# Altium PCB SC1.0.pcbdoc (part 2 of 2)
Units mm, origin at the board's own origin, x right, y up, seen from the top; angles counter-clockwise.
Board outline 78.88 x 53.72 mm, 2 copper layers (Top Layer, Bottom Layer); 127 components, 102 nets, 381 pads, 137 vias.
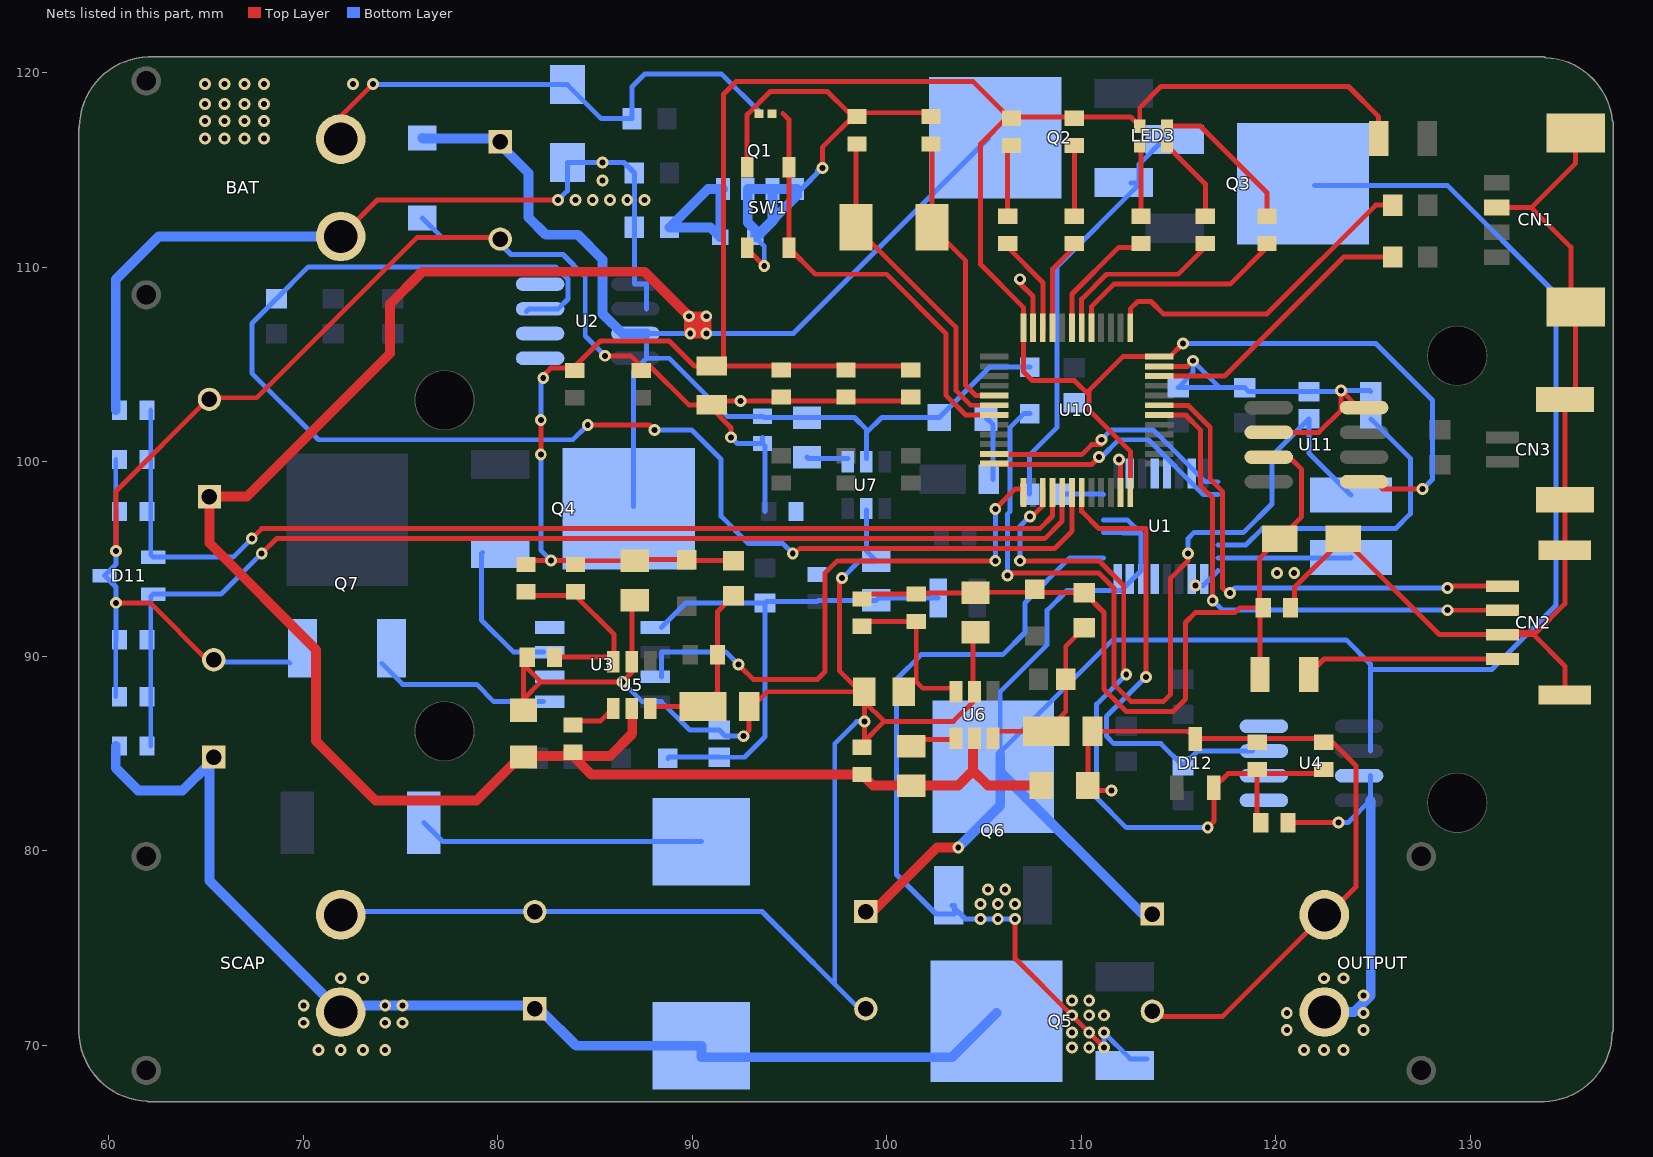
[diagram p2: the nets of this part, all layers, seen from the top]

## Via types
v1: diameter 0.61, hole 0.305, Top Layer to Bottom Layer, 137 vias

## Nets (pads, with @x,y where several pads share a name; then routed paths per layer and width w, separated by ;. In a path a pad name is that pad's centre, name@x,y a point inside that pad or via, vN(x,y) a via of type N, cw(c..) or ccw(c..) an arc to the next point about the centre after c; other vN are vias at no path point) (continued)
GND: C1.2 C4.1 C5.2 C7.2 C8.2 C11.2 C12.2 C13.2 C14.2 C15.2 C17.2 C18.2 C19.2 C26.2 C27.2 C28.1 C29.2 C30.1 C31.1 C32.2 C33.2 C34.1 C35.1 C36.1 C37.2 C38.1 C39.1 C44.1 C45.1 C46.1 CN1.0 CN1.2 CN2.2 CN2.5 CN2.6 CN3.3 CN3.4 D1A.2 D3.2 D4.1 D9.2 D10.2 D11.3 D12.3 L7.1 OUTPUT.- Q1.1 Q1.2 Q1.3 Q7.3 R2A.1 R3.1 R8.1 R9.1 R15.1 R25.1 R26.1 R27.1 SCAP.- SW1.1 SW1.2 U1.8 U3.4 U5.2 U6.2 U7.2 U10.23 U10.35 U10.47 U11.2 U11.8 | length 356.4
  Top Layer w0.254: v1(60.379,92.758) 62.136,92.758 C12.2@65.184,89.71 ; v1(60.379,95.425) 60.379,98.494 65.184,103.299 67.618,103.299 75.865,111.547 C8.2@79.81,111.547 ; C27.2@81.334,87.227 81.324,89.964 81.323,89.594 82.223,88.694 ; C27.2@81.334,87.227 81.334,87.805 82.223,88.694 ; v1(85.525,105.458) 86.839,105.458 L7.1@87.393,104.904 ; C17.2@87.049,92.885 86.921,92.758 86.921,90.015 86.921,89.202 v1(86.414,88.694) 82.223,88.694 ; L7.1@87.392,104.905 87.856,104.905 89.827,102.934 C39.1@91.011,102.934 ; C39.1@90.822,102.934 92.002,101.754 v1(92.002,101.267) ; C39.1@91.011,102.934 91.211,103.135 v1(92.498,103.134) 94.58,103.135 97.907,103.134 C38.1@101.237,103.134 ; v1(92.637,85.9) 92.935,86.199 D1A.2@92.935,87.424 ; SW1.2@92.831,115.153 92.831,117.856 92.88,117.904 94.023,119.047 96.955,119.047 98.048,117.954 C35.1@98.479,117.954 ; SW1.1@92.891,110.919 v1(93.711,110.074) ; D1A.2@92.935,87.252 93.87,88.186 R8.1@98.86,88.186 ; v1(96.701,115.11) 96.701,116.176 C35.1@98.479,117.954 ; v1(97.717,94.028) 97.59,93.901 97.59,89.246 R8.1@98.65,88.186 ; 100.257,86.662 99.876,86.662 ; C34.1@102.289,117.954 C35.1@98.479,117.954 ; C18.2@104.575,91.234 104.447,91.107 104.447,88.364 104.448,87.678 103.432,86.662 99.876,86.662 ; v1@106.861,109.268 106.861,109.177 107.532,108.506 U10.47@107.532,106.714 ; v1(111.56,83.106) 110.601,83.106 C26.2@110.347,83.36 110.347,85.913 D9.2@110.588,86.154 115.476,86.154 D12.3@115.878,85.753 115.909,85.784 119.053,85.784 R27.1@122.482,85.784 ; v1(111.941,100.124) 112.032,100.033 U10.23@112.032,98.614 ; C15.2@113.338,71.493 117.281,71.493 OUTPUT.-@122.505,76.716 122.695,76.716 124.133,78.153 124.133,84.376 122.726,85.783 R27.1@122.482,85.783 ; U10.35@113.832,104.914 115.461,104.914 v1(115.751,105.204) ; U11.2@119.078,101.521 122.228,101.521 123.371,102.664 v1(123.371,103.68) 124.26,102.791 U11.8@125.123,102.791 ; C33.2@120.969,92.504 120.969,93.544 C32.2@123.485,96.06 128.428,91.117 CN2.2@131.676,91.117 ; CN1.2@131.379,113.083 133.15,113.078 ; CN2.6@134.876,88.017 134.876,89.508 133.267,91.117 CN2.2@131.676,91.117 ; CN2.5@134.876,95.467 134.876,92.706 133.404,91.234 131.793,91.234 CN2.2@131.676,91.117 ; CN2.5@134.876,95.467 CN3.4@134.877,98.057 CN3.3@134.877,103.207 135.429,103.759 CN1.0@135.429,107.964 ; CN1.0@135.428,107.963 135.182,107.963 135.182,111.046 133.15,113.078 ; CN1.0@135.429,116.922 135.429,115.357 133.15,113.078 ; R8.1@98.86,88.186 98.86,87.678 99.876,86.662 ; R8.1@98.86,88.186 v1(98.86,86.647) 98.86,85.458 C28.1@98.733,85.33 98.733,85.519 99.876,86.662
  Bottom Layer w0.254: D11.3@59.793,94.155 60.379,94.741 v1(60.379,95.425) 60.379,97.447 60.368,97.457 60.368,100.124 ; D11.3@59.793,94.155 60.379,93.571 v1(60.379,92.758) 60.379,90.853 60.369,90.853 60.368,87.932 ; C12.2@65.184,89.71 69.259,89.71 Q7.3@69.319,89.649 ; SCAP.-@71.936,76.716 72.103,76.883 82.223,76.883 93.596,76.883 98.987,71.493 97.336,73.144 97.336,85.519 98.463,86.647 v1(98.86,86.647) ; D4.1@76.127,112.545 77.124,111.547 C8.2@79.81,111.547 ; C8.2@79.81,111.547 80.691,110.665 83.366,110.665 84.509,109.522 84.509,106.474 v1(85.525,105.458) ; v1(86.414,88.694) 87.43,87.678 88.42,87.678 89.88,86.219 C11.2@91.396,86.219 91.715,85.9 v1(92.637,85.9) ; v1(92.002,101.267) 92.321,100.948 93.623,100.948 93.739,100.832 93.739,97.457 ; Q1.3@92.861,114.032 Q1.2@94.131,114.032 ; 93.622,100.947 93.622,101.267 ; v1(93.711,110.074) 93.711,111.097 D3.2@93.253,111.554 95.4,113.703 95.4,114.036 Q1.2@94.13,114.031 ; Q1.1@95.401,114.037 95.627,114.037 v1(96.701,115.11) 96.574,114.983 v1@96.447,114.983 ; v1(97.717,94.028) 98.606,94.917 C19.2@99.465,94.917 98.957,95.426 U7.2@98.957,97.534 ; C29.2@105.11,102.283 105.479,101.915 D10.2@105.479,99.108 ; R3.1@114.989,103.818 C4.1@118.418,103.818 ; R3.1@114.989,103.818 115.751,104.581 v1(115.751,105.204) 117.137,103.818 C4.1@118.418,103.818 118.618,103.618 C1.2@121.72,103.618 123.308,103.618 v1(123.371,103.68) 124.832,103.68 C5.2@124.895,103.618 ; v1(115.878,93.647) 116.284,93.647 117.046,94.409
  Bottom Layer w0.508: Q1.2@94.13,114.031 Q1.1@95.4,114.036 ; Q1.1@95.401,114.037 95.401,113.702 D3.2@93.253,111.554 ; D3.2@93.253,111.554 93.253,111.924 92.861,112.316 Q1.3@92.861,114.032 Q1.2@94.131,114.032 94.131,112.371 93.314,111.554 D3.2@93.253,111.554
  other v1: 120.069,94.282 120.958,94.282 106.861,109.395
HI3: Q4.1 U3.7 | length 7.4
  Bottom Layer w0.254: Q4.1@79.236,95.349 79.175,95.288 79.175,91.869 80.826,90.218 82.375,90.218
I_CHASSIS: C16.2 U4.7 U10.19 | length 24.8
  Top Layer w0.254: U10.19@110.031,98.613 110.031,97.462 110.925,96.568 113.338,96.568 v1(113.338,88.948)
  Bottom Layer w0.254: v1(113.338,88.948) 111.306,86.916 111.306,85.9 111.687,85.519 114.1,85.519 C16.2@115.243,84.387 ; C16.2@115.243,84.387 115.994,85.138 118.824,85.138
I_IN: C6.2 U2.7 U10.18 | length 74.7
  Top Layer w0.254: v1(84.636,101.902) 87.811,101.902 v1(88.065,101.648) ; v1(95.177,95.298) 95.558,95.552 108.639,95.552 109.532,96.445 U10.18@109.532,98.614
  Bottom Layer w0.254: 81.486,107.744 81.613,107.871 83.112,107.871 83.62,108.379 83.62,109.395 82.985,110.03 70.275,110.03 C6.2@68.634,108.39 67.364,107.119 67.364,104.569 70.793,101.14 83.874,101.14 v1(84.636,101.902) ; v1(88.065,101.648) 89.97,101.648 91.494,100.124 91.494,97.203 92.891,95.806 94.669,95.806 v1(95.177,95.298)
IN_HI1: U1.1 U10.11 | length 13.1
  Top Layer w0.254: U10.11@105.733,100.414 105.768,100.378 110.036,100.378 110.544,100.886 111.052,100.886 v1(111.052,101.14)
  Bottom Layer w0.254: v1(111.052,101.14) 111.56,101.648 113.719,101.648 116.386,98.981 117.046,98.981
IN_HI2: U1.2 U10.12 | length 13
  Top Layer w0.254: U10.12@105.732,99.914 105.776,99.87 110.544,99.87 v1(110.925,100.251)
  Bottom Layer w0.254: v1(110.925,100.251) 111.052,100.251 111.941,101.14 113.465,101.14 116.284,98.321 117.046,98.321
IN_HI3: U3.2 U3.3 U10.13 | length 29.1
  Top Layer w0.254: v1(92.383,89.583) 92.51,89.456 93.145,88.821 96.447,88.821 96.828,89.202 96.828,94.282 97.463,94.917 v1(105.591,94.917) ; v1(105.591,97.584) 106.621,98.614 U10.13@107.032,98.614
  Bottom Layer w0.254: 88.42,88.948 88.42,90.218 91.748,90.218 v1(92.383,89.583) ; v1(105.591,94.917) v1(105.591,97.584)
L1_1: C1.1 D1.2 L1.1 U1.5 | length 46.7
  Top Layer w0.254: v1(106.226,94.155) 106.226,94.282 110.925,94.282 111.687,93.52 111.687,88.567 112.576,87.678 114.227,87.678 114.608,88.059 114.608,94.028 115.497,94.917 v1(115.497,95.298)
  Bottom Layer w0.254: v1(106.226,94.155) 106.226,97.33 106.353,97.457 106.353,101.775 107.059,102.481 D1.2@107.369,102.48 ; v1(115.497,95.298) 115.497,96.06 115.802,96.365 117.046,96.365 118.341,96.365 119.815,97.838 119.815,100.313 C1.1@121.72,102.218 121.72,100.454 L1.1@123.879,98.295
L1_2: L1.2 U1.7 | length 6.8
  Bottom Layer w0.254: 117.046,95.07 123.853,95.07 L1.2@123.879,95.095
L2_2: D6.2 L2.2 | length 14.7
  Bottom Layer w0.254: D6.2@76.213,81.455 77.186,80.482 L2.2@90.478,80.482
L3_1: C23.2 D1A.1 L3.1 U5.6 | length 9.1
  Top Layer w0.254: U5.6@87.861,87.374 87.912,87.424 D1A.1@90.56,87.424 91.305,88.169 C23.2@91.305,90.091 91.305,92.304 L3.1@92.129,93.128
L4_1: C24.2 D9.1 L4.1 U6.6 | length 9.1
  Top Layer w0.254: U6.6@105.387,85.723 105.819,86.154 D9.1@108.213,86.154 109.212,87.153 C24.2@109.212,88.821 109.212,90.526 L4.1@110.163,91.477
LED1_2: LED1.2 R17.2 | length 3.2
  Top Layer w0.254: R17.2@109.655,112.835 LED1.2@109.655,116.037
LED2_2: LED2.2 R18.2 | length 3.4
  Top Layer w0.254: R18.2@106.226,112.635 LED2.2@106.226,116.067
LED3_2: LED3.2 R24.2 | length 7.6
  Top Layer w0.254: LED3.2@114.418,117.262 116.139,117.262 119.561,113.84 R24.2@119.561,112.834
LED3_3: LED3.3 R19.2 | length 3.5
  Top Layer w0.254: LED3.3@113.018,116.262 113.084,116.196 R19.2@113.084,112.835
LED3_4: LED3.4 R20.2 | length 4.2
  Top Layer w0.254: LED3.4@114.418,116.262 116.386,114.294 R20.2@116.386,112.835
LED_1B: R19.1 U10.43 | length 6.5
  Top Layer w0.254: U10.43@109.532,106.714 109.532,108.637 111.93,111.035 R19.1@113.084,111.035
LED_1G: R20.1 U10.42 | length 9.1
  Top Layer w0.254: U10.42@110.031,106.716 110.031,108.374 111.306,109.649 114.999,109.649 R20.1@116.386,111.036
LED_1R: R24.1 U10.41 | length 11.6
  Top Layer w0.254: U10.41@110.531,106.716 110.531,107.986 111.687,109.141 117.666,109.141 R24.1@119.561,111.036
LED_G: R18.1 U10.46 | length 5.1
  Top Layer w0.254: R18.1@106.226,111.035 108.032,109.229 U10.46@108.032,106.714
LED_R: R17.1 U10.45 | length 4.8
  Top Layer w0.254: U10.45@108.532,106.714 108.532,109.912 R17.1@109.655,111.035
LO3: Q7.1 U3.5 | length 9.1
  Bottom Layer w0.254: Q7.1@74.044,89.644 75.121,88.567 78.921,88.567 79.81,87.678 82.375,87.678
NRST: C31.2 SW1.3 SW1.4 U10.7 | length 23.2
  Top Layer w0.254: 94.68,117.904 94.981,117.603 SW1.4@94.981,115.153 SW1.3@94.981,111.003 96.335,109.649 100.003,109.649 103.051,106.601 103.051,103.426 104.063,102.414 U10.7@105.732,102.414
OUTPUT: C14.1 C15.1 Q3.4 Q6.4 U1.12 U1.13 U4.1 U4.2 | length 114.5
  Top Layer w0.508: C14.1@98.987,76.573 102.599,80.185 v1(103.686,80.185)
  Bottom Layer w0.254: Q6.4@105.718,84.95 111.621,90.853 118.263,90.853 118.164,90.853 ; Q6.4@105.845,84.95 105.845,88.186 108.258,90.599 108.258,92.377 109.274,93.393 112.068,93.393 113.084,94.409 113.084,96.322 112.38,97.026 111.153,97.026 ; 111.153,96.365 113.084,96.314 ; 115.624,90.853 123.625,90.853 124.869,89.609 124.869,89.329 ; Q3.4@122.009,114.221 128.832,114.221 134.42,108.633 134.42,92.631 131.118,89.329 124.869,89.329 ; 124.869,85.138 124.869,86.408 124.869,89.329
  Bottom Layer w0.508: v1(103.686,80.185) 105.845,82.344 105.845,84.95 105.845,84.066 C15.1@113.338,76.573
Q1_4: D3.1 Q1.4 R1.1 | length 14.3
  Bottom Layer w0.254: R1.1@88.838,112.062 90.945,112.062 D3.1@91.453,111.554 91.453,113.899 Q1.4@91.591,114.037
  Bottom Layer w0.508: R1.1@88.838,112.062 90.812,114.037 Q1.4@91.591,114.037 91.453,113.899 D3.1@91.453,111.554 90.945,112.062 R1.1@88.838,112.062
R10_1: R10.1 U5.4 | length 2.4
  Top Layer w0.254: R10.1@83.874,86.673 85.282,86.673 U5.4@85.982,87.374
R12_2: R12.2 U7.4 | length 2.1
  Bottom Layer w0.254: R12.2@95.909,100.251 95.986,100.175 U7.4@98.018,100.175
S$12: 
S$16: 
S$25: 
S$45: 
S$47: 
S$49: 
S$51: 
S$62: 
S$67: 
S$69: 
S$6957: 
S$7138: 
S$10632: 
S$10634: 
S$10636: 
S$10642: 
S$10647: 
S$10649: 
S$10651: 
S$10658: 
S$10660: 
S$10662: 
S$10666: 
SAB1: Q2.3 Q3.3 R29.1 R29.2 U1.15 | length 23.4
  Bottom Layer w0.254: R29.2@107.358,98.346 107.359,100.368 108.766,101.775 108.766,110.051 112.987,114.272 112.987,115.308 Q3.3@114.262,116.584 ; R29.1@109.158,98.346 111.128,98.346 111.153,98.321 ; Q2.3@112.576,114.348 Q2.3@112.893,114.348
SAB2: Q5.3 Q6.3 U1.10 | length 44
  Top Layer w0.254: v1(106.607,76.502) 106.607,74.47 v1(109.528,71.549) v1(110.417,70.66) v1(111.179,69.898)
  Bottom Layer w0.254: Q6.3@103.356,77.203 104.057,76.502 v1(105.718,76.502) v1(106.607,76.502) ; Q6.3@103.482,77.203 103.482,76.756 102.543,76.756 100.511,78.788 100.511,88.821 101.781,90.091 105.972,90.091 107.115,91.234 107.115,92.758 109.426,95.07 111.153,95.07 ; v1(111.179,69.898) v1(111.179,70.66) 112.525,69.314 Q5.3@113.399,69.314
  other v1: 109.528,69.898 110.417,69.898 109.528,70.66 110.417,71.549 111.179,71.549 109.528,72.311 110.417,72.311 104.829,76.502 104.829,77.264 105.718,77.264 106.607,77.264 105.21,78.026 106.099,78.026
SV_CAP: C44.2 D11.2 R21.2 R25.2 U10.17 | length 57.8
  Top Layer w0.254: v1(67.872,95.298) 68.634,96.06 108.131,96.06 109.02,96.949 U10.17@109.032,98.613
  Bottom Layer w0.254: 62.167,85.392 62.167,87.932 ; 62.168,87.932 62.168,90.853 62.168,93.081 D11.2@62.293,93.205 ; D11.2@62.293,93.205 65.779,93.205 v1(67.872,95.298)
SV_CHASSIS: C46.2 D12.2 R23.2 R27.2 U10.15 | length 38.9
  Top Layer w0.254: v1(106.861,94.917) 110.925,94.917 112.195,93.647 112.195,89.202 v1(112.322,89.075) ; v1(107.369,97.203) 107.496,97.203 108.032,97.739 U10.15@108.032,98.613 ; v1(116.513,81.201) 116.828,81.516 D12.2@116.828,83.254 117.558,83.984 119.053,83.984 R27.2@122.482,83.984 ; R23.2@119.043,81.455 C46.2@119.053,83.985
  Bottom Layer w0.254: v1(106.861,94.917) 106.861,96.695 v1(107.369,97.203) v1@107.559,97.203 ; v1(112.322,89.075) 110.798,87.551 110.798,82.725 112.322,81.201 v1(116.513,81.201)
SV_JUDGE: C45.2 D11.1 R22.2 R26.2 U10.16 | length 56.1
  Top Layer w0.254: v1(67.364,96.06) 67.872,96.568 107.877,96.568 108.532,97.224 U10.16@108.532,98.613
  Bottom Layer w0.254: 62.168,102.664 62.168,100.124 62.168,97.457 62.168,95.23 D11.1@62.293,95.105 66.409,95.105 v1(67.364,96.06)
SWCLK: R13.2 U10.37 | length 17.4
  Top Layer w0.254: U10.37@112.533,106.716 112.533,107.871 112.914,108.252 113.592,108.252 114.227,107.617 119.561,107.617 125.149,113.205 R13.2@126.027,113.205
SWDIO: R14.2 U10.34 | length 14.7
  Top Layer w0.254: U10.34@113.83,104.414 117.374,104.414 123.498,110.538 R14.2@126.027,110.538
U1_6: C5.1 U1.6 | length 16.3
  Bottom Layer w0.254: 117.046,95.73 118.468,95.73 119.307,96.568 126.165,96.568 126.927,97.33 126.927,100.185 C5.1@124.895,102.218
U5_3: C20.2 R1A.1 R2A.2 U5.3 | length 9.4
  Top Layer w0.254: R1A.1@81.461,93.128 84.001,93.128 85.982,91.147 85.982,90.015 85.931,89.964 R2A.2@83.123,89.964
U6_3: C22.2 R7.1 R8.2 U6.3 | length 12.1
  Top Layer w0.254: R7.1@98.733,91.35 99.187,91.804 C22.2@101.527,91.804 101.527,88.821 R8.2@100.892,88.186 ; C22.2@101.527,91.804 101.527,88.694 101.857,88.364 U6.3@103.508,88.364
U6_4: R11.1 U6.4 | length 2.4
  Top Layer w0.254: R11.1@101.273,85.392 101.603,85.723 U6.4@103.508,85.723
U9_2: CN2.1 U9.2 | length 10.3
  Top Layer w0.254: U9.2@121.7,89.075 122.492,89.867 CN2.1@131.676,89.867
U10_5: C34.2 U10.5 X1.1 | length 14.8
  Top Layer w0.254: C34.2@102.289,116.154 102.344,116.099 X1.1@102.344,112.062 104.067,110.339 104.067,103.934 104.587,103.414 U10.5@105.732,103.414
U10_6: C35.2 U10.6 X1.2 | length 17.1
  Top Layer w0.254: C35.2@98.479,116.154 98.423,116.099 X1.2@98.423,112.063 103.559,106.927 103.559,103.68 104.325,102.914 U10.6@105.732,102.914
USART1_RX: CN2.4 U10.31 | length 26.4
  Top Layer w0.254: U10.31@113.83,102.913 115.497,102.913 116.64,101.77 116.64,99.108 117.275,98.473 117.275,93.52 117.529,93.266 v1(117.656,93.266) ; v1(128.832,93.52) 128.929,93.617 CN2.4@131.676,93.617
  Bottom Layer w0.254: v1(117.656,93.266) 117.91,93.52 v1(128.832,93.52)
USART1_TX: CN2.3 U10.30 | length 26.8
  Top Layer w0.254: U10.30@113.83,102.415 115.37,102.415 116.132,101.653 116.132,98.781 116.767,98.146 v1(116.767,92.885) ; v1(128.832,92.377) CN2.3@131.676,92.367
  Bottom Layer w0.254: v1(116.767,92.885) 117.275,92.377 v1(128.832,92.377)
V_CAP: C12.1 C13.1 L2.1 Q5.4 R21.1 SCAP.+ | length 59.1
  Bottom Layer w0.508: 60.369,85.392 60.369,84.259 61.522,83.106 63.808,83.106 65.184,84.483 65.184,84.63 65.184,78.468 SCAP.+@71.936,71.716 72.277,72.057 v1(74.222,72.057) v1(75.111,72.057) 81.969,72.057 82.223,71.803 84.044,69.982 L2.1@90.478,69.982 90.478,69.39 103.366,69.39 Q5.4@105.652,71.676
  other v1: 70.793,69.771 71.936,69.771 73.079,69.771 74.222,69.771 70.031,71.168 74.222,71.168 75.111,71.168 70.031,72.057 71.936,73.454 73.079,73.454
V_CHASSIS: OUTPUT.+ R23.1 U4.3 U4.4 | length 18.6
  Top Layer w0.254: R23.1@120.842,81.455 v1(123.244,81.455)
  Bottom Layer w0.254: v1(123.244,81.455) 123.726,81.455 124.869,82.598 124.869,83.868
  Bottom Layer w0.508: OUTPUT.+@122.505,71.716 124.046,71.716 124.895,72.565 124.895,82.573 124.869,82.598
  other v1: 121.466,69.771 122.482,69.771 123.498,69.771 120.577,70.787 124.514,70.787 120.577,71.676 124.514,71.676 124.514,72.565 122.482,73.454 123.498,73.454
V_JUDGE: BAT.+ D2.2 R1.2 R2.2 R22.1 U2.1 U2.2 | length 44.6
  Top Layer w0.254: BAT.+@71.936,111.594 73.801,113.459 v1(83.112,113.459)
  Bottom Layer w0.254: v1(83.112,113.459) 83.59,113.938 D2.2@83.59,115.396 v1(85.398,115.396) 86.498,115.396 R2.2@87.038,114.856 R1.2@87.038,112.062 87.039,109.141 87.658,109.141 87.658,107.871
  Bottom Layer w0.508: 60.368,102.664 60.368,109.384 62.578,111.594 BAT.+@71.936,111.594
  other v1: 84.001,113.459 84.89,113.459 85.779,113.459 86.668,113.459 87.557,113.459 85.398,114.475
VCC-3.3: C17.1 C20.1 C36.2 C37.1 C38.2 C39.2 D8.1 L3.2 L6.1 LED1.1 LED2.1 LED3.1 R1A.2 U8.1 U10.24 U10.36 U10.48 U11.5 | length 145.2
  Top Layer w0.254: R1A.2@81.461,94.928 v1(82.754,94.928) C20.1@84.001,94.928 ; v1(82.223,100.378) v1(82.223,102.156) ; v1(82.35,104.315) 82.35,104.442 82.731,104.823 83.884,104.823 83.965,104.904 85.281,106.22 88.827,106.22 90.112,104.935 C39.2@91.011,104.934 ; C20.1@84.001,94.927 C17.1@87.049,94.917 87.106,94.974 D8.1@89.716,94.974 89.761,94.929 L3.2@92.129,94.928 ; C38.2@101.237,104.935 97.907,104.935 94.58,104.935 C39.2@91.011,104.934 ; 110.417,103.196 110.417,103.426 109.655,104.188 107.496,104.188 107.032,104.652 107.032,106.714 107.032,107.954 104.829,110.157 104.829,116.342 LED2.1@106.226,117.739 ; U10.24@112.533,98.613 112.533,100.549 110.417,102.664 110.417,103.68 112.152,105.415 U10.36@113.83,105.415 ; U10.36@113.832,105.414 114.564,105.414 v1(115.243,106.093) ; U11.5@125.123,98.981 125.504,98.6 v1(127.562,98.6) ; U8.1@125.296,116.634 125.296,117.757 123.752,119.301 114.1,119.301 113.018,118.219 LED3.1@113.018,117.262 112.54,117.739 109.655,117.739 LED2.1@106.226,117.739 ; C39.2@91.011,104.934 91.621,104.935 91.621,118.92 92.256,119.555 104.448,119.555 106.226,117.777 LED2.1@106.226,117.739
  Bottom Layer w0.254: v1(82.223,100.378) 82.223,95.46 v1(82.754,94.928) ; v1(82.223,102.156) 82.223,104.188 v1(82.35,104.315) ; v1(115.243,106.093) 125.149,106.093 128.07,103.172 128.07,99.108 v1(127.562,98.6)
VCC-5: C18.1 C22.1 C32.1 C33.1 D7.1 L4.2 R7.2 U9.1 U11.3 | length 44.1
  Top Layer w0.254: R7.2@98.733,93.15 98.787,93.204 C22.1@101.527,93.204 101.589,93.266 C18.1@104.575,93.266 ; C18.1@104.575,93.301 107.623,93.301 D7.1@107.623,93.484 ; D7.1@107.623,93.45 107.796,93.277 L4.2@110.163,93.277 111.179,92.261 111.179,88.313 112.322,87.17 114.735,87.17 115.37,87.805 115.37,91.742 115.878,92.25 117.91,92.25 118.164,92.504 C33.1@119.17,92.504 ; U11.3@119.078,100.251 119.205,100.124 120.831,100.124 121.339,99.616 121.339,97.191 C32.1@120.208,96.06 119.169,95.021 C33.1@119.169,92.504 ; U9.1@119.2,89.075 119.2,92.473 C33.1@119.169,92.504
VCC-12: C11.1 C19.1 C21.1 D5.1 L5.2 R6.2 U3.1 | length 27.2
  Bottom Layer w0.254: 88.42,91.488 89.679,92.747 R6.2@93.75,92.747 93.823,92.82 96.417,92.82 96.482,92.885 C19.1@99.465,92.885 99.592,93.012 L5.2@102.656,93.012 ; D5.1@88.757,84.757 88.819,84.819 C11.1@91.396,84.819 ; C11.1@91.396,84.819 92.698,84.818 93.749,85.87 R6.2@93.749,92.748
VCC-24: C7.1 C8.1 C26.1 C27.1 C28.2 C29.1 C30.2 D1.1 D4.2 Q2.4 Q4.4 R10.2 R11.2 R12.1 U2.3 U2.4 U5.5 U6.5 U7.5 | length 174.3
  Top Layer w0.508: C27.1@81.334,84.827 81.379,84.873 83.874,84.873 84.817,83.93 C28.2@98.733,83.93 99.303,83.36 R11.2@101.273,83.36 103.686,83.36 104.447,84.122 ; C27.1@81.334,84.827 81.151,84.828 78.921,82.598 73.714,82.598 70.666,85.646 70.666,90.345 65.184,95.827 C7.1@65.184,98.219 67.11,98.219 74.476,105.585 74.476,108.125 76.127,109.776 87.557,109.776 v1(89.843,107.49) ; R10.2@83.874,84.874 85.779,84.884 86.922,86.027 U5.5@86.922,87.374 ; C26.1@107.947,83.36 105.21,83.36 104.448,84.122 ; v1(89.843,107.49) v1(90.732,106.601) ; v1(89.843,107.49) 89.843,106.664 v1(89.905,106.601) v1(90.732,106.601) ; v1(89.843,107.49) v1(90.732,107.49) v1(90.732,106.601) ; 104.447,84.122 104.447,85.723 104.448,84.122
  Bottom Layer w0.254: Q4.4@86.988,97.711 86.988,104.661 87.658,105.331 ; 93.622,102.347 91.811,102.347 88.827,105.331 87.658,105.331 ; 93.623,102.348 93.688,102.283 R12.1@95.909,102.283 98.352,102.283 98.957,101.678 U7.5@98.957,100.175 ; 98.956,101.247 98.959,101.496 99.751,102.283 C29.1@102.71,102.283 105.307,104.88 D1.1@107.369,104.88 ; Q2.4@105.241,116.634 95.208,106.601 v1(89.905,106.601) 87.658,106.601 87.658,105.331
  Bottom Layer w0.508: D4.2@76.127,116.66 76.159,116.627 79.81,116.627 81.588,114.849 81.588,112.57 82.477,111.681 84.128,111.681 85.398,110.411 85.398,107.617 86.414,106.601 87.658,106.601
XT2_-: BAT.- C2.1 D2.1 Q1.5 | length 26.9
  Top Layer w0.254: BAT.-@71.936,116.594 71.936,117.777 v1(73.587,119.428)
  Bottom Layer w0.254: v1(73.587,119.428) 73.619,119.396 74.758,119.396 D2.1@83.59,119.396 85.336,117.65 C2.1@86.911,117.65 86.911,119.29 87.557,119.936 91.527,119.936 Q1.5@93.496,117.967
  other v1: 64.951,116.634 65.967,116.634 66.983,116.634 67.999,116.634 64.951,117.523 65.967,117.523 66.983,117.523 67.999,117.523 64.951,118.412 65.967,118.412 66.983,118.412 67.999,118.412 64.951,119.428 65.967,119.428 66.983,119.428 67.999,119.428 72.571,119.428
pads on no net: BAT.P$3 BAT.P$4 D12.1 OUTPUT.P$3 OUTPUT.P$4 SCAP.P$3 SCAP.P$4 U10.1 U10.2 U10.3 U10.4 U10.10 U10.14 U10.20 U10.21 U10.22 U10.25 U10.26 U10.29 U10.39 U10.40

## Polygon pours and split planes (outlines as drawn)
GND on Top Layer "Top Layer-GND" (solid, shelved, pour order 34): 58.728,120.571 58.728,67.358 137.087,67.358 137.087,120.571 58.728,120.571
XT2_- on Top Layer "Top Layer-XT2_-" (solid, shelved, pour order 0): 71.936,114.094 73.333,114.094 74.095,114.983 74.095,119.936 73.587,120.571 58.728,120.571 58.728,114.983 59.744,114.094
V_JUDGE on Top Layer "Top Layer-V_JUDGE" (solid, shelved, pour order 8): 70.158,110.919 70.158,111.046 70.158,112.824 71.174,113.84 73.333,113.84 74.476,114.983 82.096,114.983 83.112,115.872 83.747,116.38 87.938,116.38 88.446,115.745 88.446,113.205 87.938,112.697 82.731,112.697 82.35,113.078 74.476,113.078 73.587,112.316 73.587,110.665 72.698,109.776 71.936,109.776 71.174,109.776 70.158,110.919
V_CAP on Top Layer "Top Layer-V_CAP" (solid, shelved, pour order 30): 69.65,72.311 70.92,73.835 74.095,73.835 75.619,72.438 75.619,70.279 74.603,69.263 70.539,69.263 69.65,70.279
V_CHASSIS on Top Layer "Top Layer-V_CHASSIS" (solid, shelved, pour order 32): 120.196,72.311 122.101,73.962 124.641,73.962 125.403,73.073 125.403,70.914 123.625,69.009 121.339,69.009 120.196,70.152
GND on Bottom Layer "Bottom Layer-GND" (solid, shelved, pour order 36): 58.728,120.571 58.728,67.358 137.087,67.358 137.087,120.571
OUTPUT on Bottom Layer "Bottom Layer-OUTPUT 1" (solid, shelved, pour order 26): 117.275,116.761 117.275,118.031 118.545,119.301 125.911,119.301 135.182,110.284 135.309,91.361 131.372,87.551 128.578,87.551 126.292,84.757 125.022,84.884 124.641,91.107 128.578,91.107 131.753,93.901 131.753,107.109 129.594,109.395 119.053,109.395 117.275,111.173
OUTPUT on Bottom Layer "Bottom Layer-OUTPUT" (solid, shelved, pour order 24): 102.924,88.059 103.813,89.075 106.48,89.075 108.512,91.107 126.038,91.107 125.911,85.011 126.038,84.757 123.625,84.757 122.99,85.392 122.99,87.805 121.466,89.71 111.306,89.71 109.909,88.186 109.909,82.725 108.893,81.709
SAB1 on Bottom Layer "Bottom Layer-SAB1" (solid, shelved, pour order 22): 111.433,112.951 111.433,113.459 111.433,116.634 112.703,118.031 115.37,118.031 116.767,116.761 116.767,114.221 115.751,113.205 111.814,113.205 111.433,113.459 111.433,112.951
VCC-24 on Bottom Layer "Bottom Layer-VCC-24" (solid, shelved, pour order 10): 86.414,106.982 86.033,106.601 86.033,104.061 85.144,103.299 85.144,101.648 84.636,101.14 84.128,101.14 83.62,100.632 83.747,99.235 90.224,99.235 90.224,100.632 89.716,101.14 87.811,101.14 87.43,101.648 87.43,102.156 87.811,102.41 90.859,102.41 91.494,101.775 102.035,101.775 103.305,101.775 103.305,102.664 104.956,104.315 105.972,104.315 106.48,103.934 107.623,103.934 107.877,104.442 107.877,112.824 108.512,113.586 108.512,114.729 102.035,119.555 100.765,118.539 100.765,114.348 95.558,109.522 94.542,108.633 90.732,108.633 90.224,108.125 89.716,108.125 89.208,107.49 88.7,106.982 86.414,106.982
V_CAP on Bottom Layer "Bottom Layer-V_CAP" (solid, shelved, pour order 18): 92.256,72.184 95.812,72.184 97.971,70.025 100.003,70.025 100.892,70.914 100.892,73.581 102.416,74.597 102.67,68.755 108.766,68.755 107.877,67.993 93.526,68.12 92.764,68.247
BRIDGE3 on Bottom Layer "Bottom Layer-BRIDGE3" (solid, shelved, pour order 12): 74.603,100.632 80.318,100.632 81.08,100.124 81.08,99.235 80.318,98.727 80.318,97.838 74.603,94.155 74.476,94.282
BRIDGE3 on Bottom Layer "Bottom Layer-BRIDGE3 1" (solid, shelved, pour order 14): 68.761,94.155 70.412,92.504 70.412,85.392 68.126,83.487 67.745,83.106 67.745,80.185 68.888,78.915 70.285,78.915 72.317,80.185 72.317,82.979 73.079,83.741 73.333,83.995 81.08,83.995 81.588,84.249 81.588,85.265 79.556,85.265 78.667,84.249 74.222,84.249 72.952,85.9 72.952,92.504 74.603,94.155 74.603,94.282
V_CHASSIS on Bottom Layer "Bottom Layer-V_CHASSIS" (solid, shelved, pour order 20): 120.196,72.311 120.196,69.136 121.974,67.358 137.087,67.358 137.087,83.995 135.309,85.646 128.07,85.646 126.673,84.122 124.133,84.122 124.26,82.598 124.26,76.121 120.196,72.311
V_JUDGE on Bottom Layer "Bottom Layer-V_JUDGE" (solid, shelved, pour order 6): 85.906,108.125 86.414,107.49 88.827,107.49 89.335,108.125 89.335,109.522 87.938,110.665 87.938,115.491 87.303,116.253 85.144,116.253 84.509,116.888 82.985,116.888 82.223,116.126 82.223,114.221 82.223,113.713 82.985,112.951 85.525,112.951 85.906,112.57 85.906,109.776
V_CAP on Bottom Layer "Bottom Layer-V_CAP 1" (solid, shelved, pour order 28): 69.65,72.311 70.92,73.835 86.414,73.708 88.319,71.93 88.7,67.866 71.047,67.866 69.65,69.644
XT2_- on Bottom Layer "Bottom Layer-XT2_-" (solid, shelved, pour order 2): 74.095,114.983 73.333,114.094 59.744,114.094 58.728,114.983 58.728,120.571 96.066,120.571 96.066,115.999 95.685,115.491 90.986,115.491 90.351,115.999 90.351,118.285 89.589,119.047 87.684,119.047 87.43,118.031 86.414,117.142 85.525,117.396 82.604,117.396 81.588,118.285 74.984,118.285 74.095,117.269
C2_2 on Bottom Layer "Bottom Layer-C2_2" (solid, shelved, pour order 4): 88.319,118.158 88.319,114.348 89.97,114.348 89.97,117.904 89.335,118.539 88.192,118.539 88.192,118.285
L2_2 on Bottom Layer "Bottom Layer-L2_2" (solid, shelved, pour order 16): 88.7,82.725 78.286,82.598 77.27,83.614 74.222,83.614 73.206,82.852 73.206,80.185 74.476,78.915 86.922,78.915 88.065,78.28 88.446,78.534

## Keep-outs
Keep-Out Layer:
  lines w0.254: 58.601,70.719 58.601,117.135 ; 58.601,70.759 ccw(c62.101,70.759) 62.156,67.26 ; 58.629,117.143 cw(c62.129,117.198) 62.129,120.698 ; 62.07,67.231 133.772,67.231 ; 62.07,120.698 133.787,120.698 ; 133.658,120.67 cw(c133.713,117.17) 137.213,117.17 ; 133.686,67.232 ccw(c133.686,70.732) 137.185,70.787 ; 137.226,70.762 137.226,117.455

## Other copper
Top Layer:
  region net SAB2: 104.194,77.772 104.829,78.407 106.353,78.407 106.988,77.772 106.988,76.121 111.687,72.184 111.687,69.517 111.052,68.882 108.893,68.882 104.194,72.946
Bottom Layer:
  region net BRIDGE3: 69.269,93.647 68.761,94.155 68.888,94.536 69.269,94.536 69.269,93.774
  region net BRIDGE3: 74.095,93.647 74.73,94.155 74.603,94.282 74.222,94.282 74.095,94.155 74.095,93.901
  region net BRIDGE3: 74.349,93.901 74.984,93.901 74.603,94.155
  region net BRIDGE3: 74.984,94.917 74.984,94.028 75.365,93.901 75.365,94.79 75.111,94.79
  region net L2_2: 88.319,78.28 88.065,78.28 87.049,78.915 87.557,78.915 88.319,78.915
  region net SAB2: 109.147,72.311 109.401,72.692 111.052,72.692 111.687,72.184 111.687,70.533 112.576,69.898 112.703,68.755 112.322,68.755 111.306,69.517 109.401,69.517 109.147,69.771
  region net SAB2: 104.067,78.28 104.702,78.28 104.829,78.407 106.353,78.407 106.988,77.772 106.988,76.121 106.734,75.74 104.575,75.74 104.067,76.121
  region net SAB1: 111.433,114.983 111.433,113.459 111.56,113.459 111.56,114.983
  region net OUTPUT: 108.639,81.455 109.401,82.217 108.131,82.217
  region net OUTPUT: 108.893,90.98 108.385,91.361 108.385,90.853

## Silkscreen, mask and mechanical layers (free items; w line width, h text height)
Top Overlay:
  text "R" at 114.227,118.73 h1.14 r180
  text "B" at 112.703,114.793 h1.14 r180
  text "G" at 114.227,114.793 h1.14 r180
  text "SC1.0" at 78.451,92.25 h1.6 r90

## Dimensions
62.07,120.826 to 62.07,67.104 on Top Layer
58.473,117.135 to 137.354,117.455 on Top Layer